# Altium PCB Necklace_v2_pcb.PcbDoc
Units mm, origin at the board's own origin, x right, y up, seen from the top; angles counter-clockwise.
Board outline 28 x 40 mm, 2 copper layers (Top Layer, Bottom Layer); 17 components, 15 nets, 52 pads, 7 vias.
Unrouted connection lines stored in the file: 12.
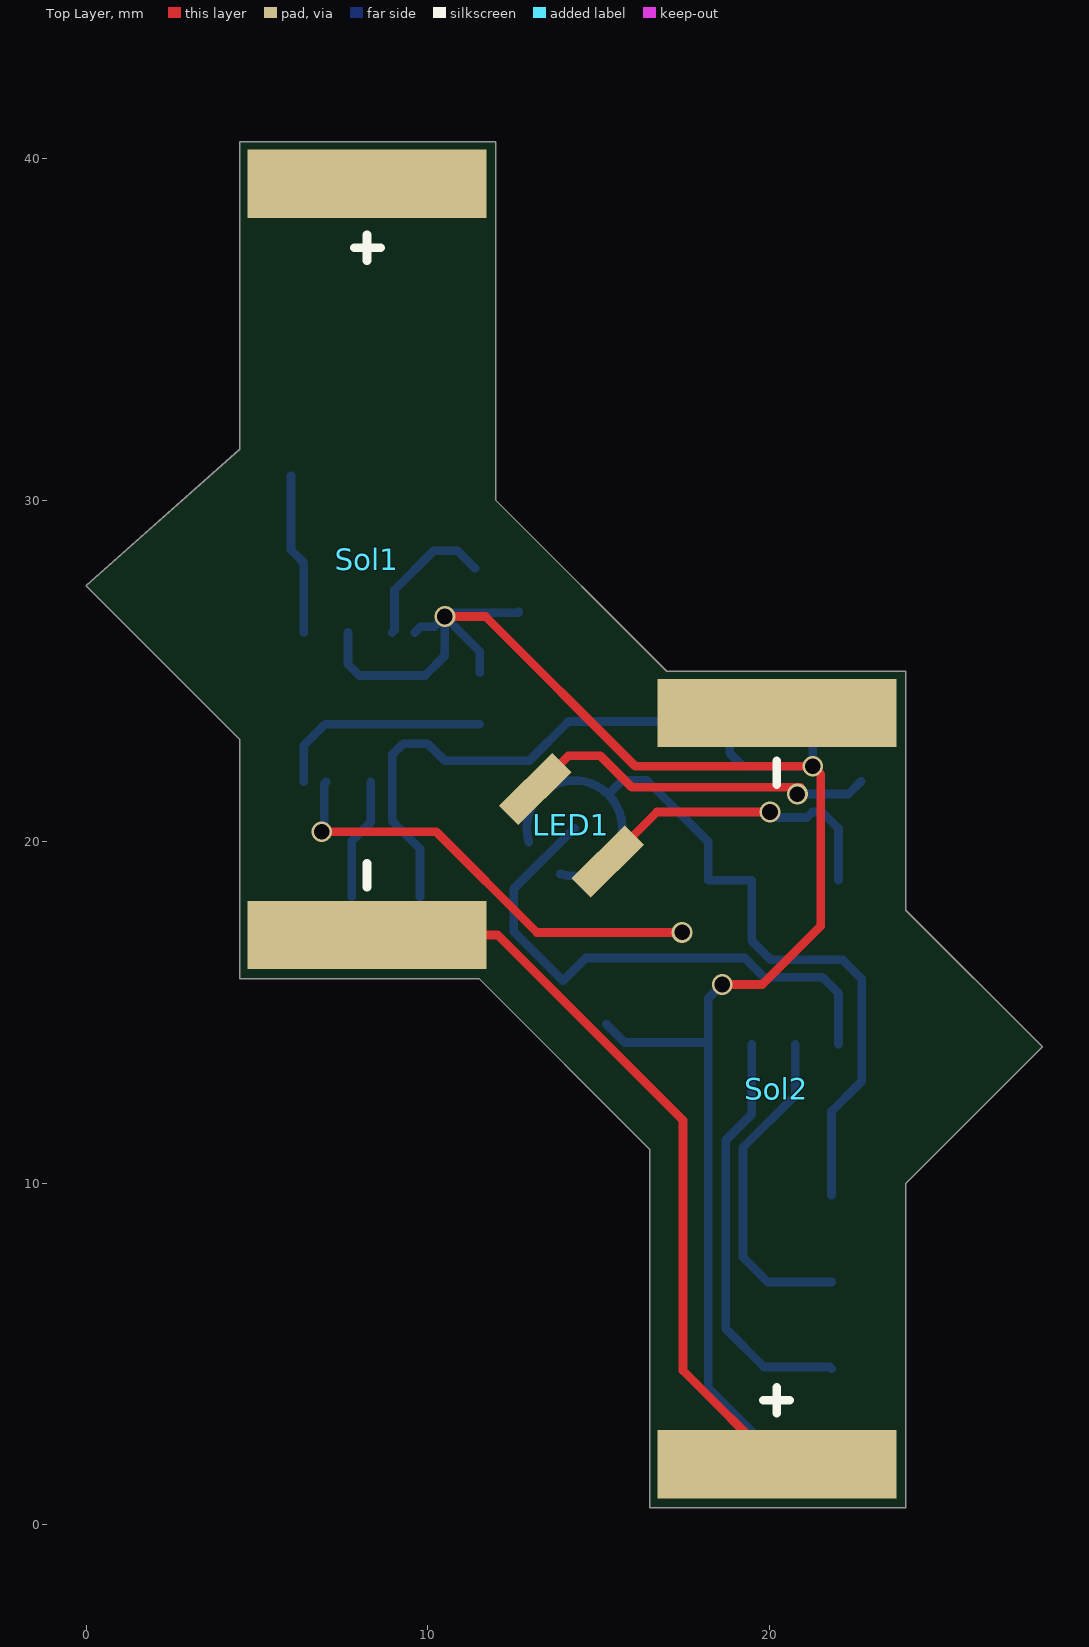
[diagram p0: Top Layer view]
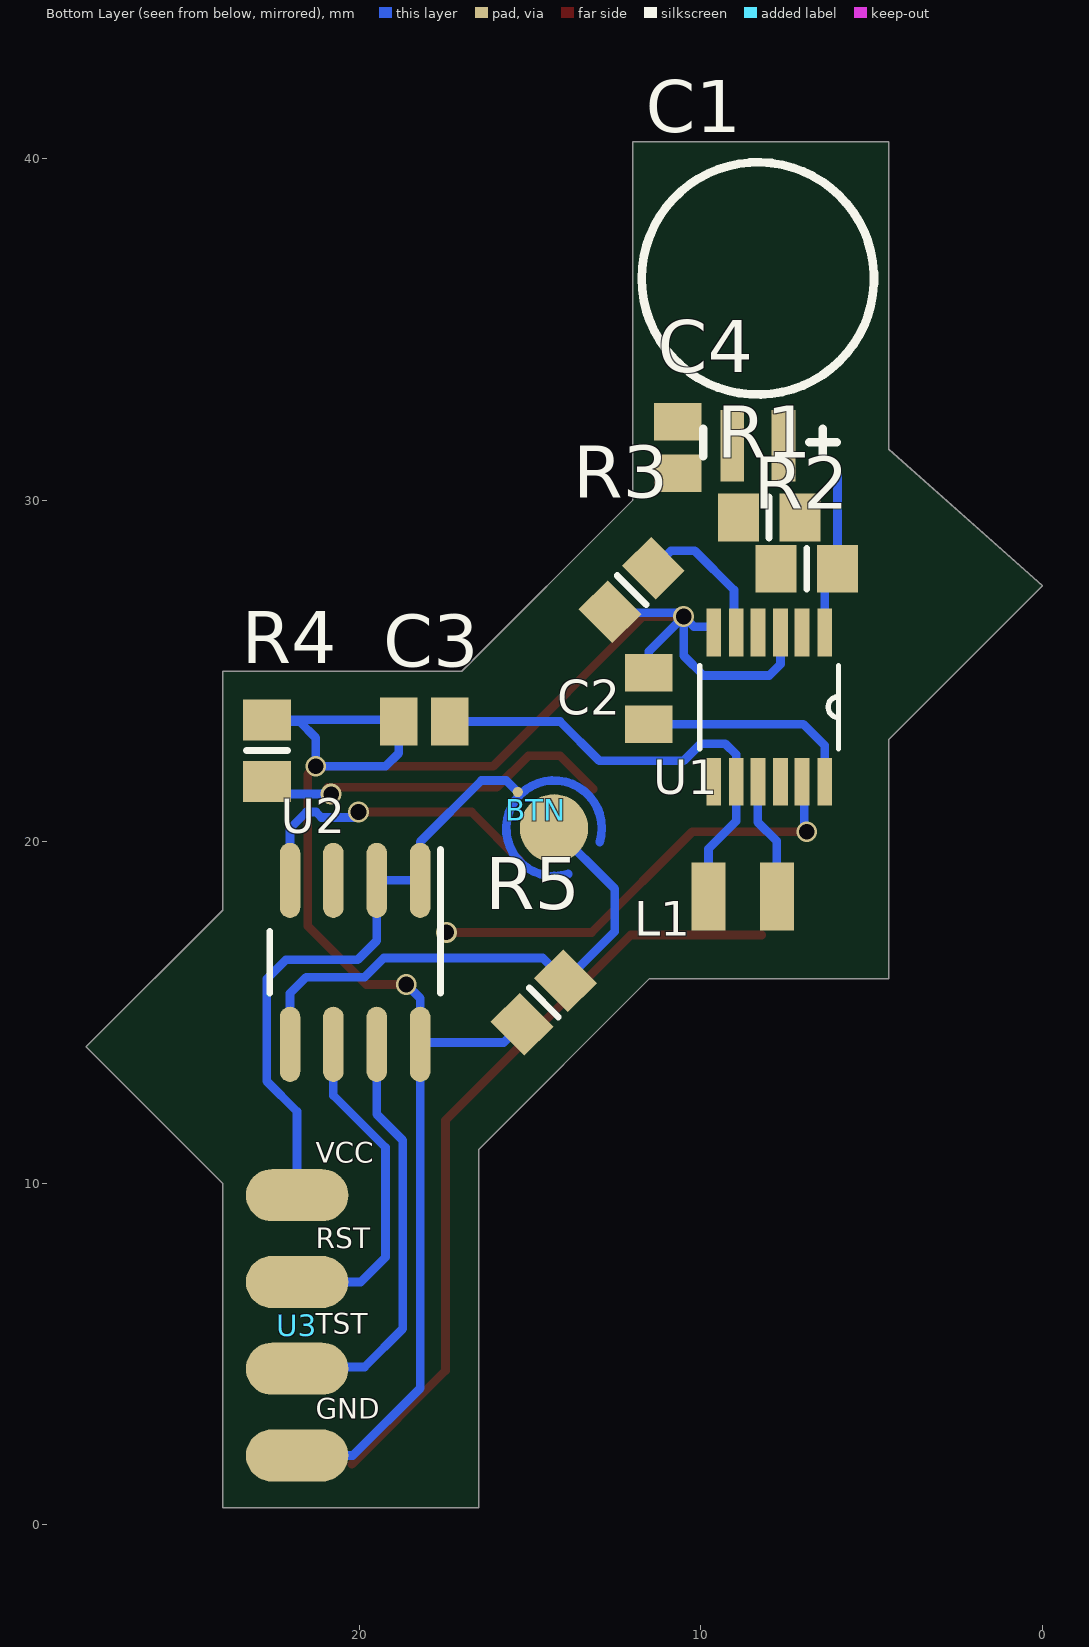
[diagram p1: Bottom Layer view, seen from below]

## Layer stack, top to bottom
Top Solder: solder mask 0.0102, Solder Resist, Dk 3.5
Top Layer: signal copper 0.0356
Dielectric 1: dielectric 0.32, FR-4, Dk 4.8
Bottom Layer: signal copper 0.0356
Bottom Solder: solder mask 0.0102, Solder Resist, Dk 3.5

## Board outline
16.5,0.5 24,0.5 24,10 28,14 24,18 24,25 17,25 12,30 12,40.5 4.5,40.5 4.5,31.5 0,27.5 4.5,23 4.5,16 11.5,16 16.5,11

## Design rules (kind name [scope] priority, off if disabled: settings)
Clearance [All] p1: gap=0.254 ignorepadtopadclearanceinfootprint=FALSE except(0: Arc-Hole Track-Hole SMDPad-Hole THPad-Hole Via-Hole Fill-Hole Poly-Hole Region-Hole Text-Hole)
PolygonConnect [All] p1: connectstyle=Relief reliefconductorwidth=0.254 reliefentries=4 polygonreliefangle="90 Angle" airgapwidth=0.254
RoutingVias [All] p1: holewidth=0.711 width=1.27 viastyle="Through Hole" minholewidth=0.711 minwidth=1.27 maxholewidth=0.711 maxwidth=1.27
SolderMaskExpansion [All] p1: expansion=0.102
Width [All] p1: maxlimit=0.254 minlimit=0.254 preferedwidth=0.254
30 further rules are at their usual default settings.

## Classes and differential pairs
component class Necklace_schematic: BTN C1 C2 C3 C4 L1 LED1 R1 R2 R3 R4 R5 Sol2 U1 U2 U3

## Components (designator, comment, footprint, x,y, rotation, side; value= is the part's Value field where it differs from the comment)
BTN "Touch_sensor" Touch_sensor 14.3,20.4 r225 bottom
C1 "DMS3R3224R Supercap" "DMS3R3224R Supercap" 8.33,36.5 r270 bottom
C2 "Cap Semi" C0805 11.525,24.2 r270 bottom value=1uF
C3 "Cap Semi" C0805 18.1,23.525 r180 bottom value=10uF
C4 "Cap Semi" C0805 10.675,31.55 r270 bottom value=4.7uF
L1 "Inductor" INDUCTIVITY 10.025,16.9 r180 bottom
LED1 "3528_LED" 3528_LED 13.15,21.55 r315 top
R1 "Res3" 6-0805_N 8,29.5 r180 bottom value=510k
R2 "Res3" 6-0805_N 6.9,28 r0 bottom value=1.1M
R3 "Res3" 6-0805_N 12.025,27.375 r135 bottom value=300k
R4 "Res3" 6-0805_N 22.7,22.675 r270 bottom value="200 (R=UGS/Id)"
R5 "Res3" 6-0805_N 14.6,15.3 r135 bottom value=8.2M
Sol1 "Solar Panel" Solarzelle 4.725,41.275 r270 top
Sol2 "Solar Panel" Solarzelle 23.725,-0.225 r90 top
U1 "LTC3105EMSPBF" SOP65P490X110-12N 8,23.95 r270 bottom
U2 "MSP430G2210IDR" MSP430G2210 20.125,16.475 r270 bottom
U3 "Program_connector" Program_connector 21.825,9.655 r0 bottom

## Footprints (in the part's own frame and the unit in brackets; to place one, negate y for a bottom-side part, rotate by r counter-clockwise, add the part's x,y. Pads: shape width x height; smd on the part's side, far side on the other; paste and mask are expansions set on the pad)
6-0805_N [mm] "Chip Resistor, Body 2.0x1.2mm, IPC Medium Density"
  rect 1.2x1.4 smd: 1(-0.9,0) 2(0.9,0)
  silkscreen extent 0,-0.6 0,0.6, body extent -1.07,-0.7 1.07,0.7, height 0.7
3528_LED [mm]
  rect 0.8x2.2 smd: 0(3,0) 1(0,0)
  body extent -0.25,-1.25 3.25,1.25, height 1
C0805 [mm] "Chip Capacitor, Body 2.0x1.3mm, IPC High Density"
  rect 1.1x1.4 smd: 1(-0.75,0) 2(0.75,0)
  body extent -1.1,-0.72 1.1,0.72, height 1.4
"DMS3R3224R Supercap" [mm]
  rect 2.1x0.7 smd: 0(4.9,0.75) 1(4.9,-0.75)
  silkscreen extent -3.4,-3.4 5.2,3.4, body extent -3.4,-3.4 5.6,3.4, height 1.8
INDUCTIVITY [mm]
  rect 1x2 smd: 0(0.25,1.5) 1(2.25,1.5)
  body extent -0.25,0 2.75,3, height 1
MSP430G2210 [mm] "SOIC, 8-Leads, Body 4.9x3.9mm, Pitch 1.27mm, IPC Medium Density"
  oval 2.2x0.6 smd: 1(-2.4,1.905) 2(-2.4,0.635) 3(-2.4,-0.635) 4(-2.4,-1.905) 5(2.4,-1.905) 6(2.4,-0.635) 7(2.4,0.635) 8(2.4,1.905)
  silkscreen extent -3.3,-2.5 0.9,2.5, body extent -3,-2.45 3,2.45, height 1.63
Program_connector [mm]
  oval 3x1.524 smd: 0(0,0) 1(0,2.54) 2(0,5.08) 3(0,7.62)
Solarzelle [mm]
  rect 2x7 smd: 0(24,3.5) 1(2,3.5)
  silkscreen extent 3.5,3.12 22.6,3.9, body extent 2,0 24,7, height 1.6
SOP65P490X110-12N [mil]
  rect 55x17 smd: 1(-86,64) 2(-86,38) 3(-86,13) 4(-86,-13) 5(-86,-38) 6(-86,-64) 7(86,-64) 8(86,-38) 9(86,-13) 10(86,13) 11(86,38) 12(86,64)
  silkscreen extent -48,-80 48,80
Touch_sensor [mm]
  round 2 smd mask+0.1: 0(0,0)
  round 0.3 smd: 1(-1.5,0)
  Top Layer lines w0.254: 1.235,0.659 ccw(c0,0) 1.238,-0.654

## Part data
C1: Capacity=220mF
C2 C3 C4: "Capacitor (Semiconductor SIM Model)", LatestRevisionDate=29-May-2009, LatestRevisionNote="IPC-7351 Footprint Added.", PackageDescription="Chip Capacitor", PackageReference=C1206, Published=8-Jun-2000, Publisher="Altium Limited"
L1: library part Inductivity
R1 R2 R3 R4 R5: "Resistor", LatestRevisionDate=29-May-2009, LatestRevisionNote="IPC-7351 Footprint Added.", PackageDescription="Chip Resistor", PackageReference=J1-0603, Published=8-Jun-2000, Publisher="Altium Limited"
Sol1 Sol2: library part Solar_Panel
  Sol2: Name=KXOB22-04X3F, Vmpp=1.5V
U1: "Ic Conv Dc/Dc Step Down 12-Msop", Package="MSOP-12 Linear Technology", Availability=Unavailable, MF="Linear Technology/Analog", MP=LTC3105EMS#PBF, Price=None, SnapEDA_Link=https://www.snapeda.com/parts/LTC3105EMS%23PBF/Linear%20Technology/Analog%20Devices/view-part/?ref=snap
U2: "MIXED SIGNAL MICROCONTROLLER, D0008A", Alternate Manufacturer="Texas Instruments", Alternate PartNumber=MSP430G2210ID, ComponentLink1Description="Datasheet Link", ComponentLink1URL=http://www.ti.com/lit/ds/symlink/msp430g2210.pdf, CompType=IC, LatestRevisionDate=2015-05-28, Manufacturer="Texas Instruments", MountType=SMT, PackageReference=D0008A, PartNumber=MSP430G2210IDR, Publisher="Texas Instruments", RoHS=Y, SymbolCreator=Altium, SymbolVersion=2015-05-26, U/M=EA

## Via types
v1: diameter 0.61, hole 0.457, Top Layer to Bottom Layer, 7 vias

## Nets (pads, with @x,y where several pads share a name; then routed paths per layer and width w, separated by ;. In a path a pad name is that pad's centre, name@x,y a point inside that pad or via, vN(x,y) a via of type N, cw(c..) or ccw(c..) an arc to the next point about the centre after c; other vN are vias at no path point)
Capacitive_Sensor: BTN.0 R5.2 U2.5 | length 16.1
  Bottom Layer w0.254: BTN.0 12.525,18.625 12.525,17.375 R5.2 14.627,16.6 19.282,16.6 19.84,16.042 21.558,16.042 22.03,15.57 U2.5
FB: R1.2 R2.1 U1.1 | length 4.7
  Bottom Layer w0.254: 6,30.725 6,28.55 6.374,28.176 U1.1
GND: C1.1 C2.1 C3.1 C4.2 R1.1 R3.1 R4.1 R5.1 Sol1.1 U1.3 U1.6 U1.7 U2.8 U3.3 | length 61.1
  Top Layer w0.254: v1(10.504,26.6) 11.693,26.6 16.077,22.216 v1(21.279,22.216) 21.512,21.983 21.512,17.537 19.8,15.825 v1(18.625,15.825)
  Bottom Layer w0.254: U1.3 7.67,25.205 8,24.875 9.925,24.875 10.504,25.454 v1(10.504,26.6) ; U1.6 9.791,26.3 10.204,26.3 v1(10.504,26.6) ; C2.1 11.525,25.579 v1(10.504,26.6) ; R3.1 12.661,26.711 10.615,26.711 v1(10.504,26.6) ; R5.1 15.775,14.125 18.17,14.125 U2.8 ; v1(18.625,15.825) 18.22,15.42 U2.8 ; U3.3 20.19,2.035 18.22,4.005 U2.8 ; 18.85,22.6 19.234,22.216 v1(21.279,22.216) 21.279,23.054 21.75,23.525 22.65,23.525 R4.1 18.9,23.575 C3.1 18.85,22.6
LED_out: LED1.0 U2.4 | length 9.2
  Top Layer w0.254: LED1.0 16.718,20.875 v1(20.025,20.875)
  Bottom Layer w0.254: v1(20.025,20.875) 20.185,20.715 21.11,20.715 21.27,20.875 21.55,20.875 22.03,20.395 U2.4
NetC2_2: C2.2 U1.12 | length 6.5
  Bottom Layer w0.254: U1.12 6.374,22.824 7,23.45 C2.2
NetC4_1: C4.1 U1.2
NetLED1_1: LED1.1 R4.2 | length 10.8
  Top Layer w0.254: LED1.1 14.125,22.525 15.05,22.525 15.975,21.6 20.925,21.6 20.826,21.501 v1(20.826,21.401)
  Bottom Layer w0.254: v1(20.826,21.401) 22.326,21.401 R4.2
NetR3_2: R3.2 U1.5 | length 4.3
  Bottom Layer w0.254: U1.5 9.029,26.198 9.029,27.379 10.175,28.525 10.875,28.525 R3.2
RST: U2.6 U3.1 | length 9.8
  Bottom Layer w0.254: U2.6 20.76,12.575 19.236,11.051 19.236,7.839 19.96,7.115 U3.1
SHDN: U1.4
SW: L1.1 U1.9 | length 3.6
  Bottom Layer w0.254: L1.1 7.775,20.025 8.33,20.58 U1.9
Test: U2.7 U3.2 | length 12.2
  Bottom Layer w0.254: U2.7 19.49,12.023 18.728,11.261 18.728,5.747 19.85,4.625 21.775,4.625 U3.2
VCC: BTN.1 C1.0 R2.2 U1.11 U2.1 U2.2 U3.0 | length 31.6
  Top Layer w0.254: v1(6.9,20.3) 10.25,20.3 13.2,17.35 v1(17.45,17.35)
  Bottom Layer w0.254: v1(6.9,20.3) 6.971,20.371 6.971,21.702 U1.11 ; BTN.1 15.7,21.8 16.425,21.8 18.22,20.005 U2.1 U2.2 19.49,17.11 20.05,16.55 22.15,16.55 22.711,15.989 22.711,12.993 21.825,12.107 U3.0
VCC_GND_solar: Sol1.0 Sol2.1 | length 22.7
  Top Layer w0.254: Sol1.0 12.05,17.275 17.475,11.85 17.475,4.525 Sol2.1
VCC_solar: C3.2 L1.0 Sol2.0 U1.8 U2.3 | length 13.7
  Bottom Layer w0.254: L1.0 9.775,19.8 8.965,20.61 U1.8 8.965,22.558 9.282,22.875 10.004,22.875 10.504,22.375 12.975,22.375 14.125,23.525 C3.2
pads on no net: U1.10

## Text inside footprints (layer, text, board x,y; h text height)
U3: Bottom Overlay "GND" at 21.275,3.105 h0.6; Bottom Overlay "TST" at 21.275,5.605 h0.6; Bottom Overlay "RST" at 21.275,8.105 h0.6; Bottom Overlay "VCC" at 21.275,10.605 h0.6